# Altium PCB MCU089B.PcbDoc (part 1 of 5)
Units mil, origin at the board's own origin, x right, y up, seen from the top; angles counter-clockwise.
Board outline 2300 x 5500 mil, 4 copper layers (Top Signal, GND, PWR, Bottom Signal), stack 61.6 mil thick; 261 components, 208 nets, 964 pads, 377 vias.
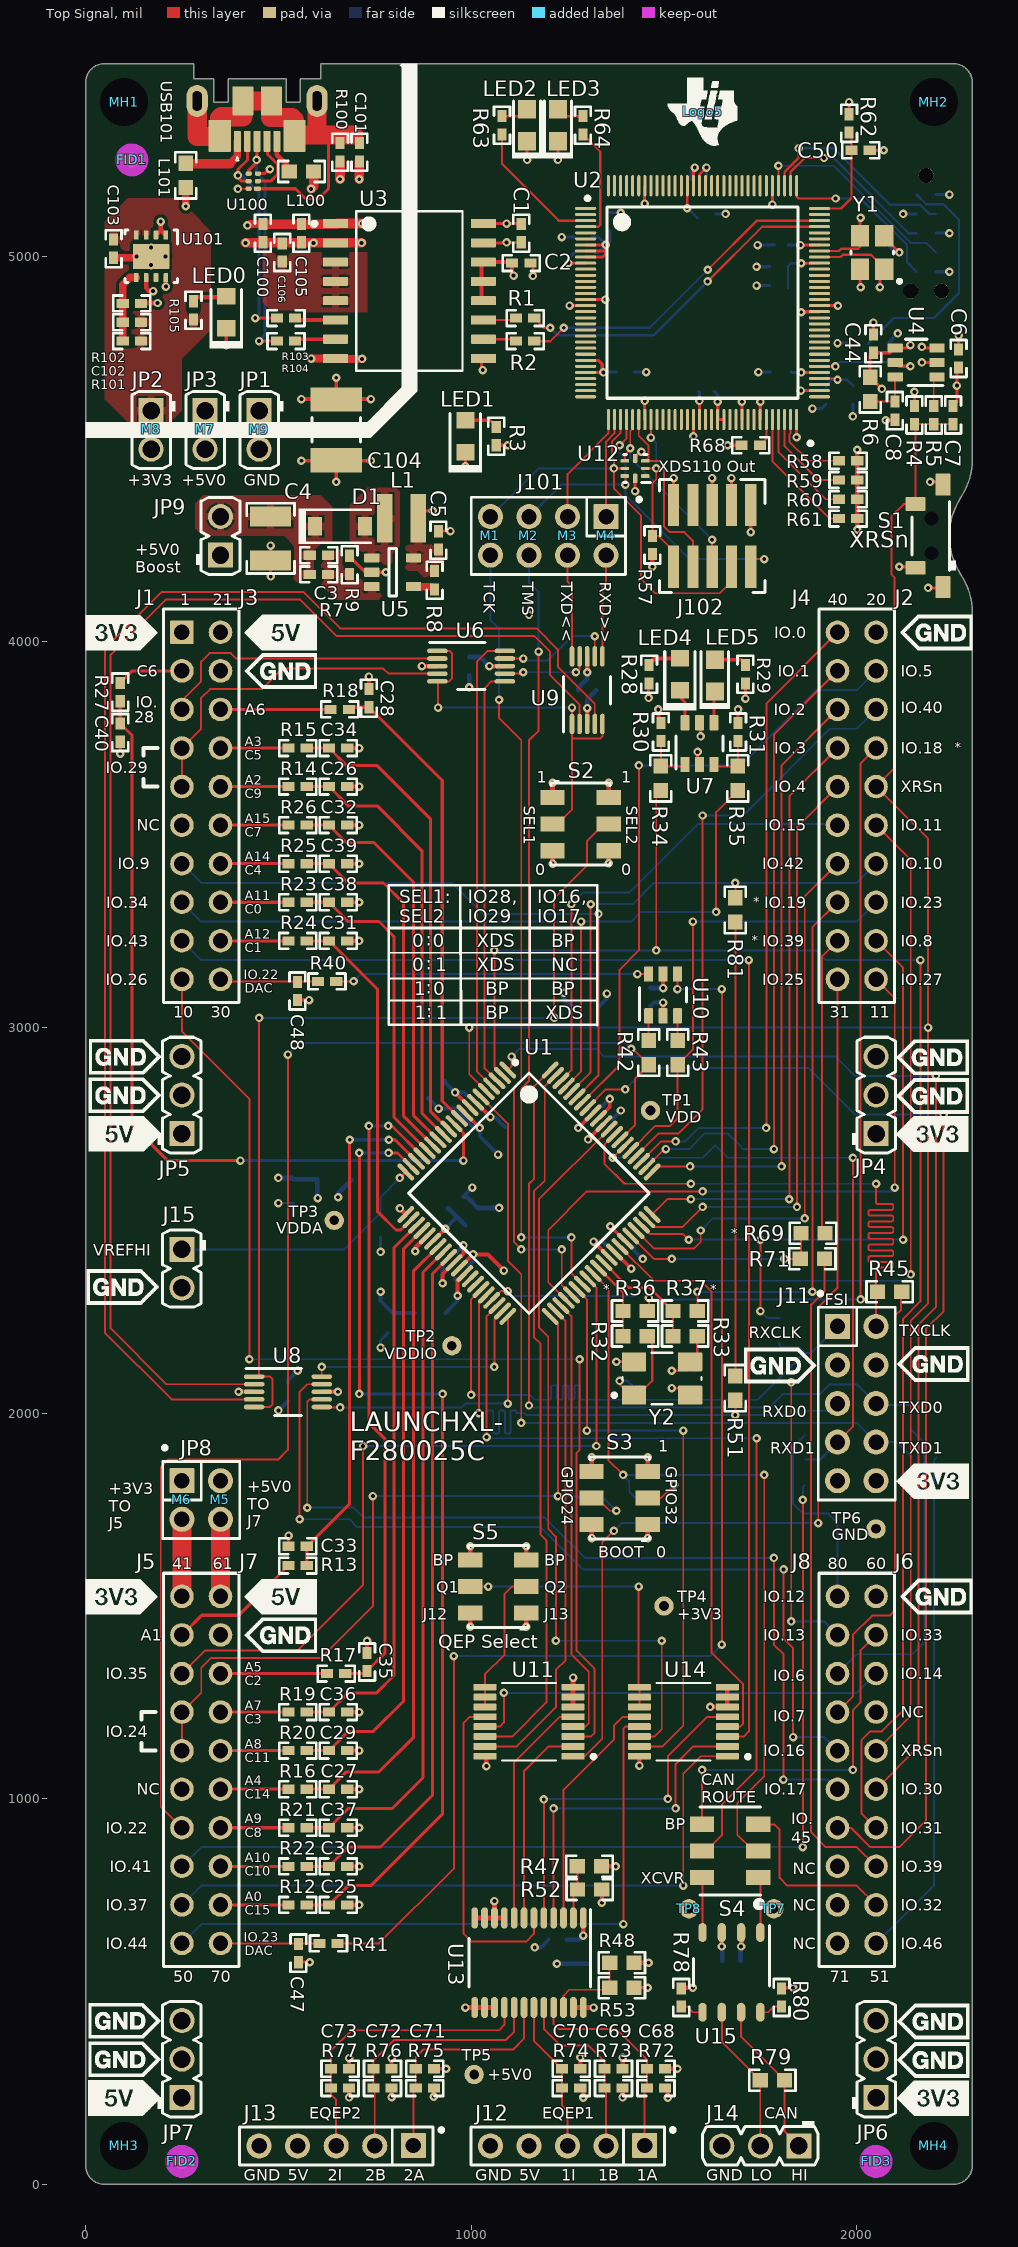
[diagram p0: Top Signal view]
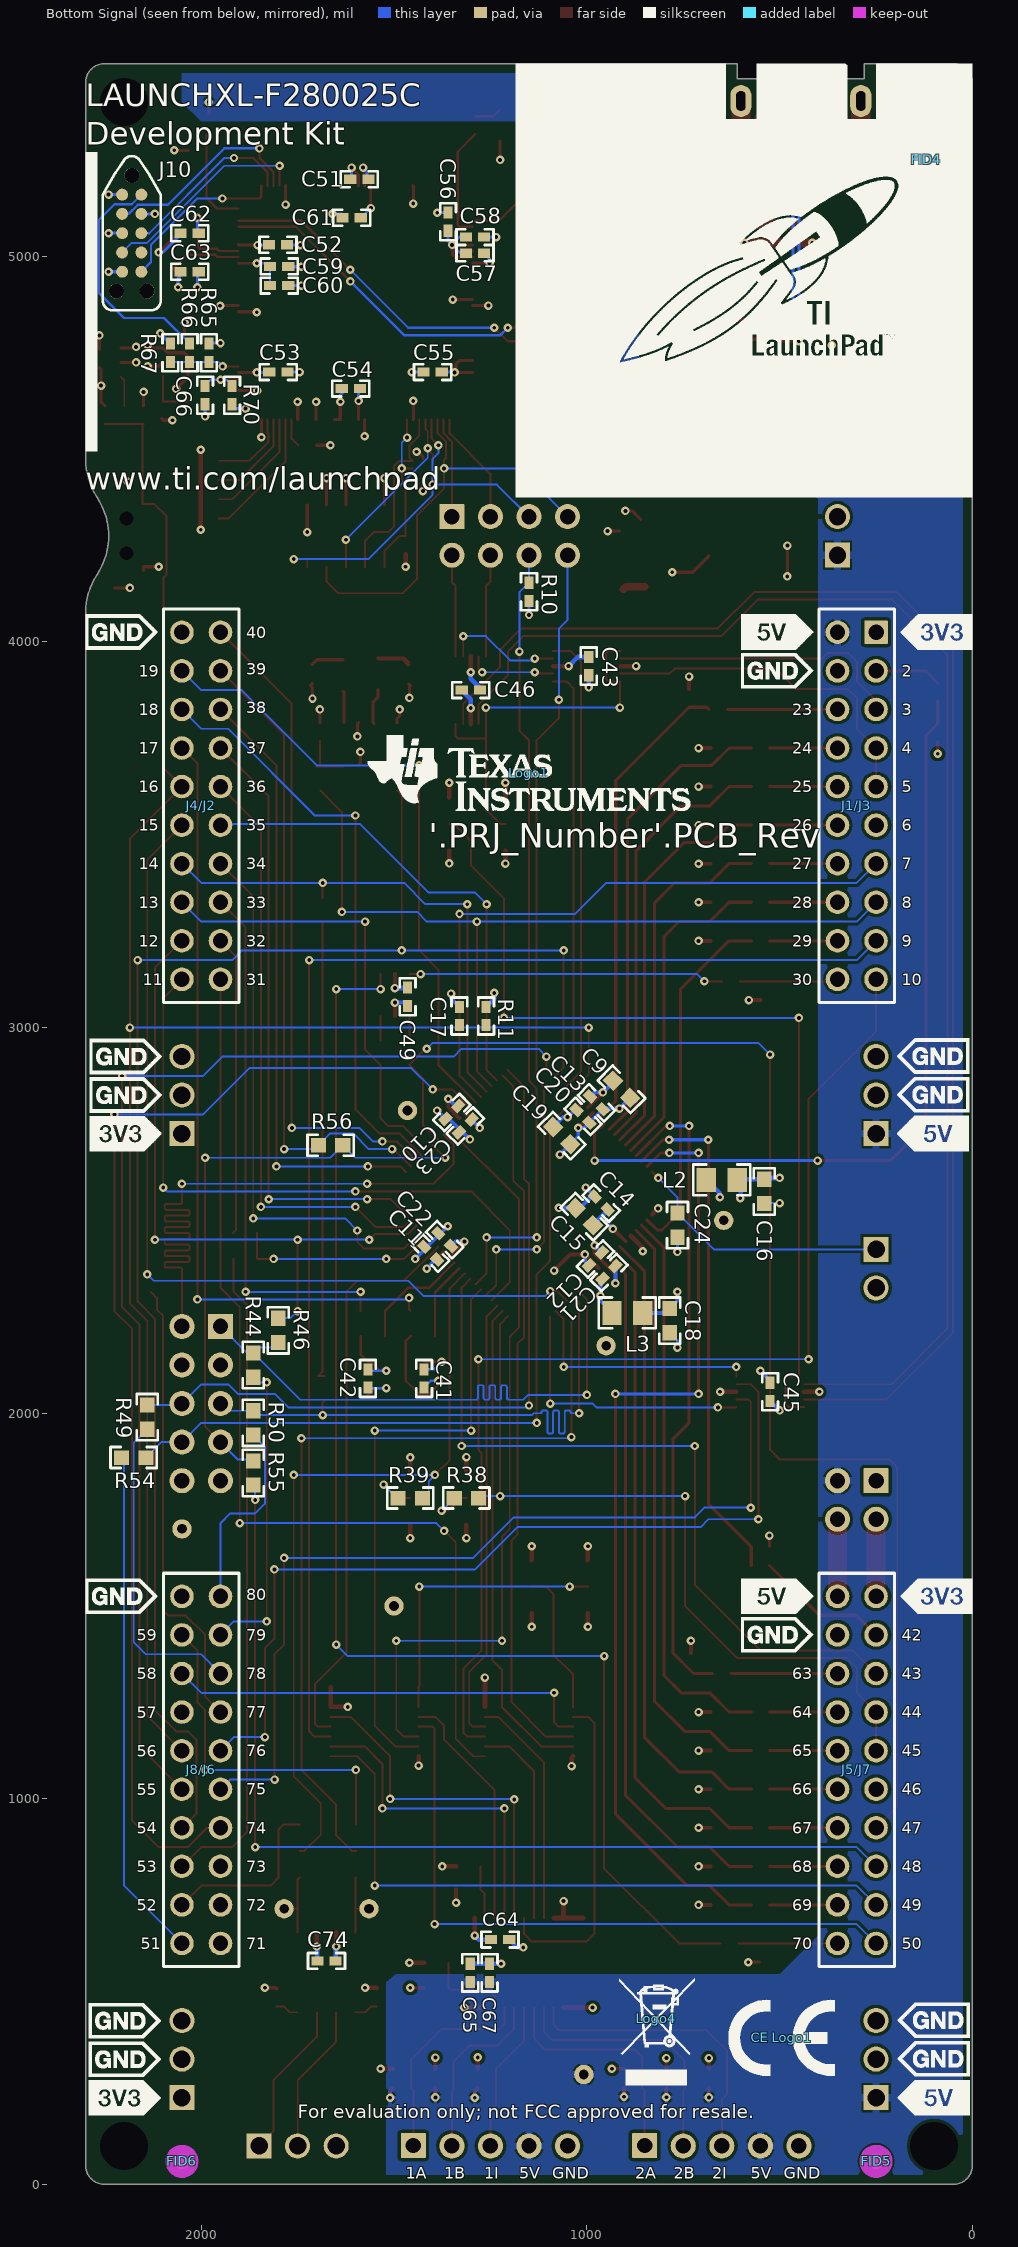
[diagram p1: Bottom Signal view, seen from below]
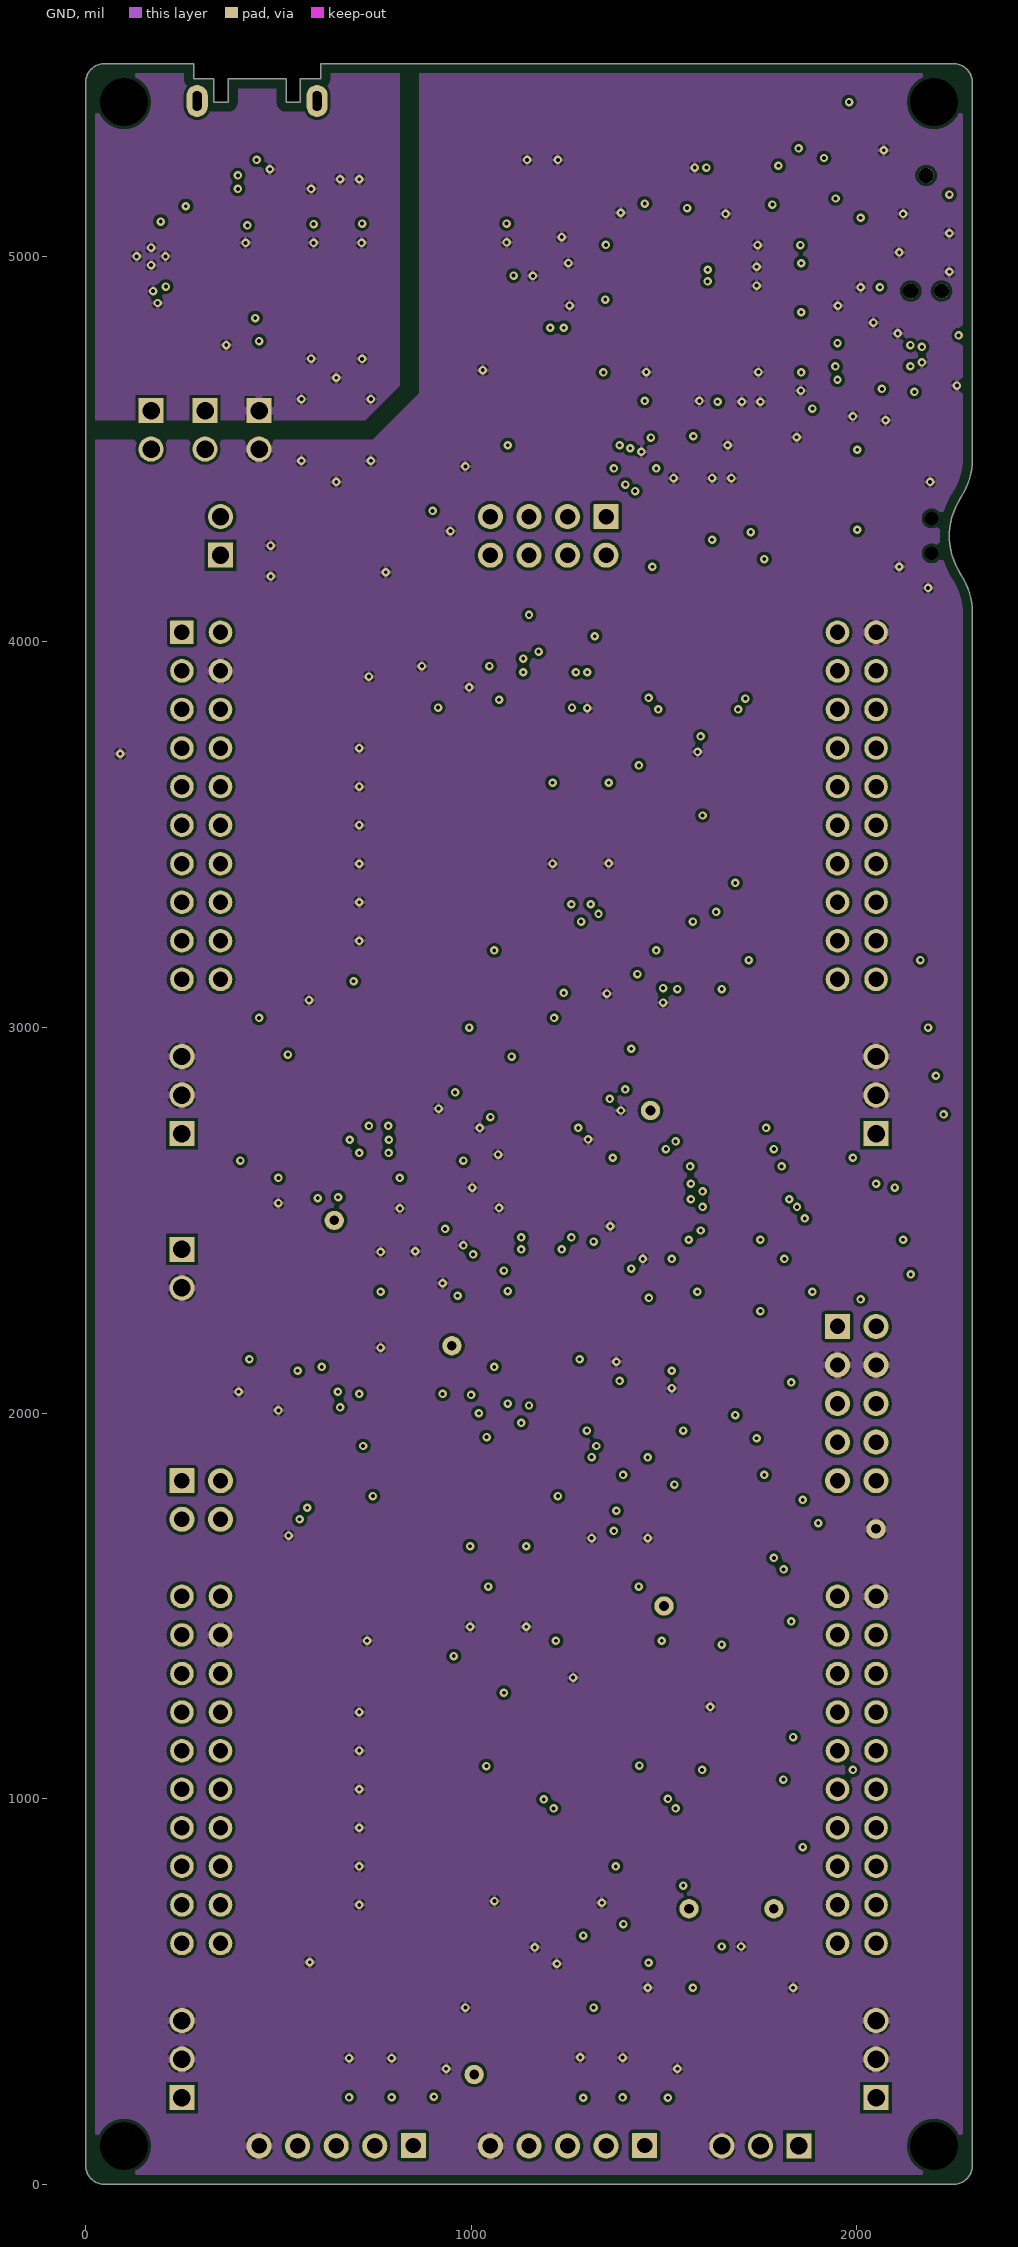
[diagram p2: GND]
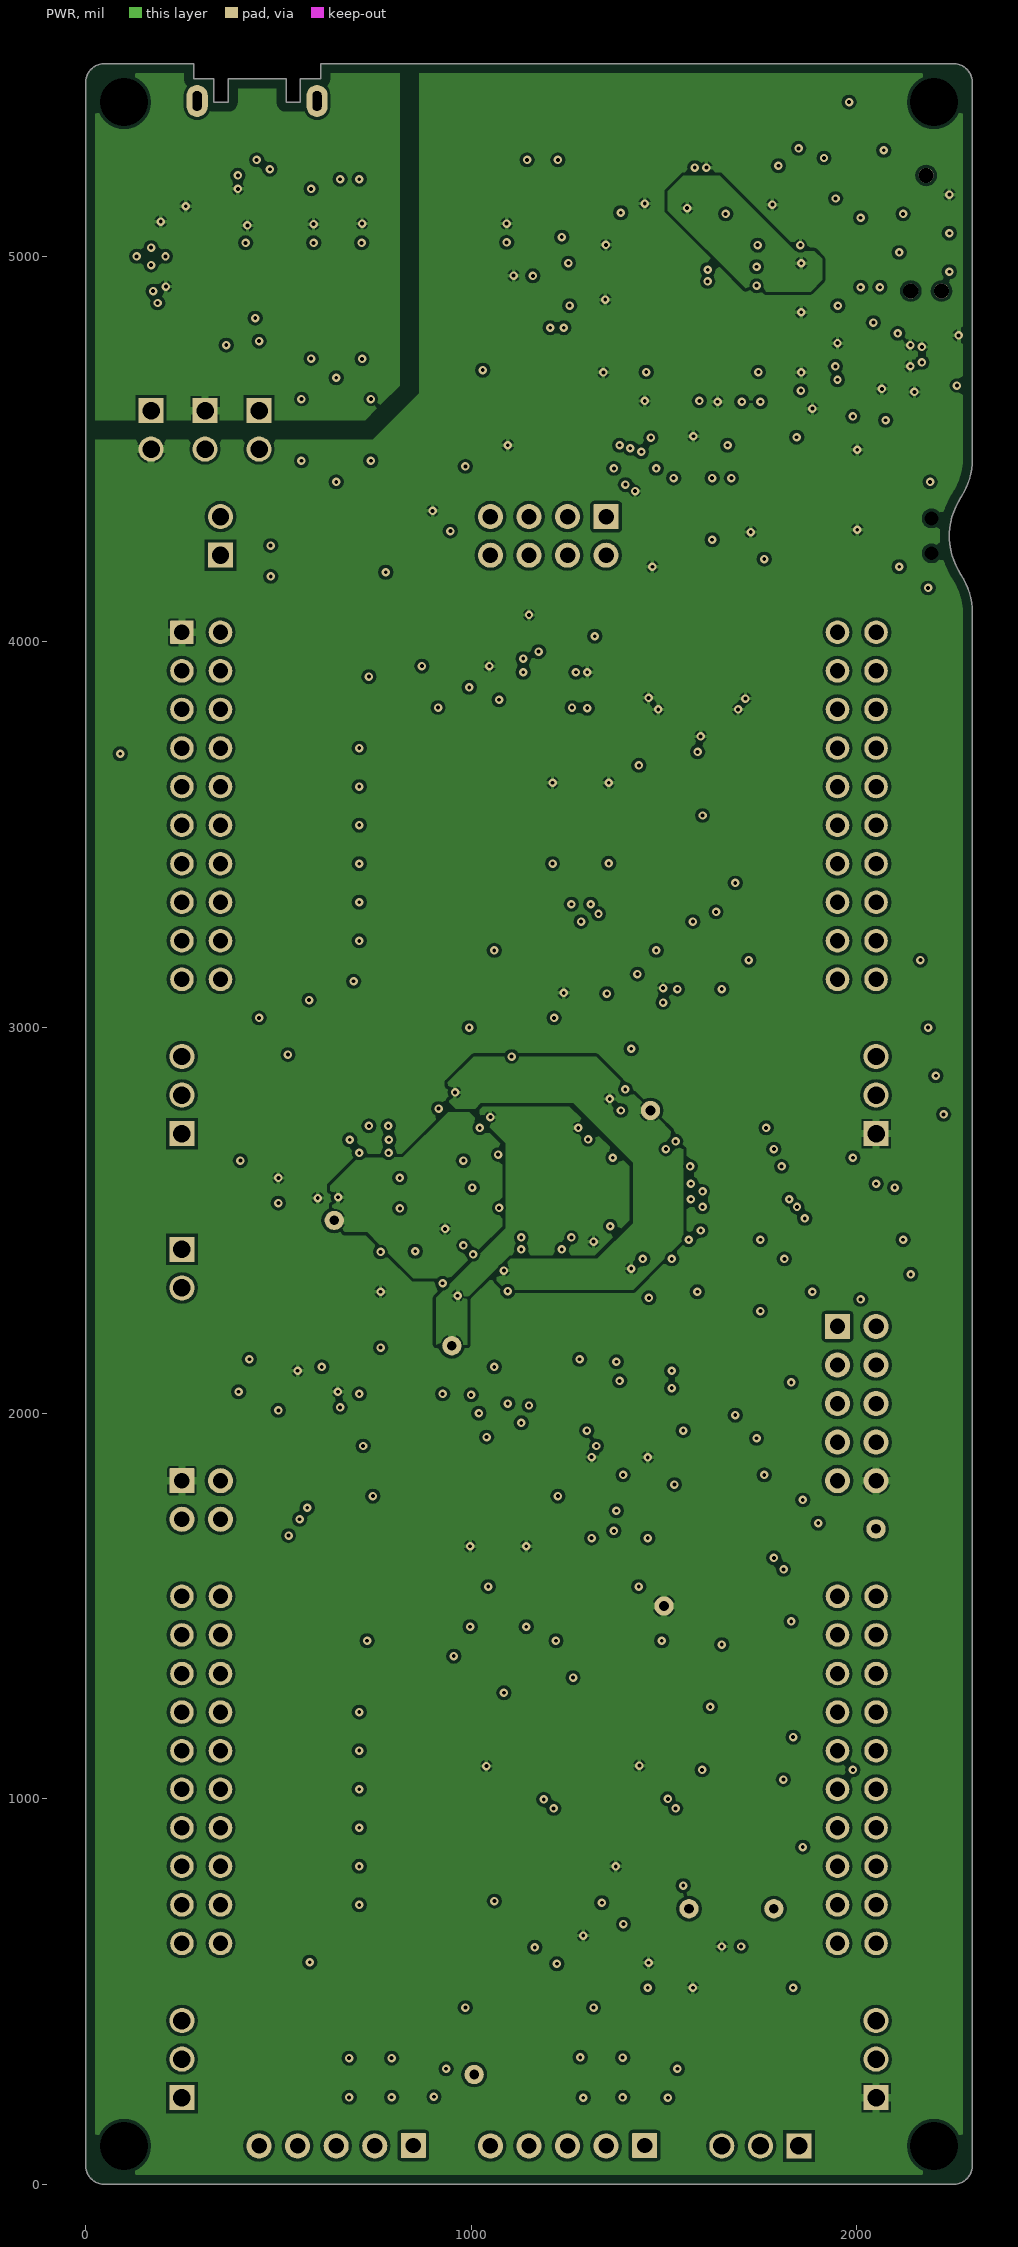
[diagram p3: PWR]

## Layer stack, top to bottom
Top Solder: solder mask 0.4, Solder Resist, Dk 3.5
Top Signal: signal copper 1.4
Dielectric 1: prepreg 8, FR-4, Dk 4.2
GND: signal copper 1.4
Dielectric 2: core 40, FR-4, Dk 4.2
PWR: signal copper 1.4
Dielectric 3: prepreg 8, FR-4, Dk 4.2
Bottom Signal: signal copper 1.4
Bottom Solder: solder mask 0.4, Solder Resist, Dk 3.5

## Board outline
50,0 cw(c50,50) 0,50 0,5450 cw(c50,5450) 50,5500 280,5500 280,5460 333,5460 333,5400 370,5400 370,5460 520,5460 520,5400 557,5400 557,5460 610,5460 610,5500 2250,5500 cw(c2250,5450) 2300,5450 2300,4475 cw(c2118.33,4475) 2270,4375 ccw(c2421.67,4275) 2270,4175 cw(c2118.33,4075) 2300,4075 2300,50 cw(c2250,50) 2250,0

## Design rules (kind name [scope] priority, off if disabled: settings)
AcuteAngle [All] p1: minimum=4.50000000000000E+0001 checktracksonly=TRUE
AssemblyTestPointUsage [All] p1: valid=2
BoardOutlineClearance BoardOutlineClearance_MountingHoles [OnCopper and InComponentClass('Mounting Holes')] p1: gap=40 ignorepadtopadclearanceinfootprint=FALSE
BoardOutlineClearance BoardOutlineClearance_Poly [OnCopper and IsPoly] p2: gap=25 ignorepadtopadclearanceinfootprint=FALSE
BoardOutlineClearance [OnCopper and Not InComponentClass('Logo') and not InComponentClass('FiducialMark') and not InRegion(1000,500,4000,800) and not InPoly] p3: gap=10 ignorepadtopadclearanceinfootprint=FALSE
Clearance Clearance_Boardedge [OnCopper and Not InComponentClass('Logo') and not InComponentClass('FiducialMark') and not IsKeepOut vs IsKeepOut] p1: gap=5 ignorepadtopadclearanceinfootprint=FALSE
Clearance Clearance_FiducialMark [InComponentClass('FiducialMark') vs InComponentClass('FiducialMark')] p2: gap=0 ignorepadtopadclearanceinfootprint=TRUE
Clearance Clearance_Keepouts [((IsTrack Or IsArc) And Not InPoly) And IsFree and IsKeepOut vs ((IsTrack Or IsArc) And Not InPoly) And IsFree and IsKeepOut] p3: gap=5 ignorepadtopadclearanceinfootprint=FALSE
Clearance Clearance_Poly [InPolygon] p4: gap=8 ignorepadtopadclearanceinfootprint=FALSE
Clearance [All] p5: gap=5 ignorepadtopadclearanceinfootprint=FALSE
ComponentClearance "ComponentClearance_overlay to overlay" [OnBottomSilkscreen vs OnTopSilkscreen] p1: gap=0 collisioncheckmode=3 verticalgap=0 showdistances=FALSE
ComponentClearance ComponentClearance_MountingHoles_FiducialMarks [InComponentClass('Mounting Holes') vs InComponentClass('FiducialMark')] p2: gap=50 collisioncheckmode=3 verticalgap=10 showdistances=FALSE
ComponentClearance ComponentClearance_Shunt [InComponentClass('Header') vs InComponentClass('Shunt')] p3: gap=0 collisioncheckmode=3 verticalgap=0 showdistances=FALSE
ComponentClearance ComponentClearance_Logo [InComponentClass('Logo')] p4: gap=0 collisioncheckmode=3 verticalgap=0 showdistances=FALSE
ComponentClearance ComponentClearance_Logo_1 [InComponentClass('Logo') vs InComponentClass('Logo')] p5: gap=0 collisioncheckmode=3 verticalgap=0 showdistances=FALSE
ComponentClearance ComponentClearance_ScrewToNut [(HasFootprint('NY PMS 440 0025 PH')) vs (HasFootprint('Keystone_1902C'))] p6: gap=5 collisioncheckmode=3 verticalgap=10 showdistances=FALSE
ComponentClearance ComponentClearance_MountingHoles [InComponentClass('Mounting Holes')] p7: gap=250 collisioncheckmode=3 verticalgap=100000 showdistances=FALSE
ComponentClearance ComponentClearance_SmallPassives [HasFootprint('0201*') or HasFootprint('0402*') or HasFootprint('0508') or HasFootprint('0603*') or HasFootprint('0612') or HasFootprint('0805*') or HasFootprint('0815*') or HasFootprint('0830*') or HasFootprint('1206*') or HasFootprint('1210*') or HasFootprint('1808*') or HasFootprint('1812*') or HasFootprint('1825*') or HasFootprint('2010*') or HasFootprint('2220*') or HasFootprint('2225*') or HasFootprint('2512*') or HasFootprint('2728*') or HasFootprint('3518*') vs HasFootprint('0201*') or HasFootprint('0402*') or HasFootprint('0508') or HasFootprint('0603*') or HasFootprint('0612') or HasFootprint('0805*') or HasFootprint('0815*') or HasFootprint('0830*') or HasFootprint('1206*') or HasFootprint('1210*') or HasFootprint('1808*') or HasFootprint('1812*') or HasFootprint('1825*') or HasFootprint('2010*') or HasFootprint('2220*') or HasFootprint('2225*') or HasFootprint('2512*') or HasFootprint('2728*') or HasFootprint('3518*')] p8: gap=10 collisioncheckmode=3 verticalgap=0 showdistances=FALSE
ComponentClearance ComponentClearance_THtoSMT [IsThruComponent vs IsSMTComponent] p9: gap=10 collisioncheckmode=3 verticalgap=10 showdistances=FALSE
ComponentClearance ComponentClearance_THtoTH [IsThruComponent vs IsThruComponent] p10: gap=20 collisioncheckmode=3 verticalgap=30 showdistances=FALSE
DiffPairsRouting [All] p1: maxlimit=100 minlimit=10 mostfreqgap=10 toplayer_minwidth=15 toplayer_maxwidth=15 toplayer_prefwidth=15 midlayer1_minwidth=15 midlayer1_maxwidth=15 midlayer1_prefwidth=15 midlayer2_minwidth=15 midlayer2_maxwidth=15 midlayer2_prefwidth=15 bottomlayer_minwidth=15 bottomlayer_maxwidth=15 bottomlayer_prefwidth=15 maxuncoupledlength=1000
FabricationTestPointUsage TestPointUsage [All] p1: valid=2 allowmultiple=FALSE
FabricationTestpoint Testpoint [All] p1: side=3 testpointundercomponent=TRUE minsize=40 maxsize=100 preferedsize=60 minholesize=0 maxholesize=40 preferedholesize=32 testpointgrid=1 allowsidetop=TRUE allowsidebottom=TRUE usegrid=TRUE gridtolerance=0.01
FanoutControl Fanout_LCC [IsLCC] p1: bgadir=Out bgaviamode=Centered fanoutstyle=Auto fanoutdirection=Alternating viagrid=1 // Fanout_LCC (Default Rule)
FanoutControl Fanout_BGA [IsBGA] p2: bgadir=Out bgaviamode=Centered fanoutstyle=Auto fanoutdirection=Alternating viagrid=1 // Fanout_BGA (Default Rule)
FanoutControl Fanout_Default [All] p4: bgadir=Out bgaviamode=Centered fanoutstyle=Auto fanoutdirection=Alternating viagrid=1 // Fanout_Default (Default Rule)
FanoutControl Fanout_Small [(CompPinCount < 5)] p5: bgadir=Out bgaviamode=Centered fanoutstyle=Auto fanoutdirection=OutThenIn viagrid=1 // Fanout_Small (Default Rule)
HoleSize [All] p1: absolutevalues=TRUE maxlimit=251 minlimit=10 maxpercent=80.000 minpercent=20.000
MatchedLengths FSIRX [InNetClass('FSIRX')] p1: tolerance=25 checknetsindiffpair=FALSE checkdiffpairvsdiffpair=TRUE checkxsignals=TRUE checkothers=TRUE
MatchedLengths FSITX [InNetClass('FSITX')] p2: tolerance=25 checknetsindiffpair=FALSE checkdiffpairvsdiffpair=TRUE checkxsignals=TRUE checkothers=TRUE
MinimumAnnularRing MinimumAnnularRing_ThermalPadVias [IsVia and InAnyComponent] p1: minimumring=5
MinimumAnnularRing [All] p2: minimumring=6
MinimumSolderMaskSliver MinimumSolderMaskSliver_Logo [InComponentClass('Logo') vs InComponentClass('Logo')] p1: minsoldermaskwidth=0.7
MinimumSolderMaskSliver [All] p2: minsoldermaskwidth=3
PlaneClearance [All] p1: clearance=5
PlaneConnect [All] p1: planeconnectstyle=Relief reliefexpansion=10 reliefentries=4 reliefconductorwidth=25 reliefairgap=10
PolygonConnect PolygonConnect_via [ViaDiameter = 22] p1: connectstyle=Relief reliefconductorwidth=10 reliefentries=4 polygonreliefangle="90 Angle" airgapwidth=5
PolygonConnect [All] p2: connectstyle=Relief reliefconductorwidth=20 reliefentries=4 polygonreliefangle="90 Angle" airgapwidth=5
RoutingVias ThermalPadVias [IsVia and InAnyComponent] p1: holewidth=7.87 width=19.68 viastyle="Through Hole" minholewidth=7.87 minwidth=19.68 maxholewidth=12.99 maxwidth=23.62
RoutingVias [All] p2: holewidth=10 width=22 viastyle="Through Hole" minholewidth=10 minwidth=22 maxholewidth=40 maxwidth=65
SilkToBoardRegionClearance [Not ((IsComment or IsDesignator) And (Hide <> 'False')) and not InRegion(1000,500,4000,800)] p1:
SilkToSilkClearance SilkToSilkClearance_Pb-FreeLogo [(HasFootprint('Pb-Free_Overlay_Medium') OR HasFootprint('Pb-Free_Overlay_Small')) vs (HasFootprint('Pb-Free_Overlay_Medium') OR HasFootprint('Pb-Free_Overlay_Small'))] p1: silktosilkclearance=0
SilkToSilkClearance [All] p2: silktosilkclearance=3
SilkToSolderMaskClearance SilkToComponentPadClearance [(IsPad or IsFill or IsRegion) and InAnycomponent] p1: minsilkscreentomaskgap=3 clearancetoexposedcopper=TRUE
SilkToSolderMaskClearance "Silk to Solder Mask Opening" [All] p2: minsilkscreentomaskgap=3 clearancetoexposedcopper=TRUE
SolderMaskExpansion [All] p1: expansion=2 istentingtop=FALSE
Width Analog [InNetClass('Analog')] p1: maxlimit=25 minlimit=8 preferedwidth=8
Width [All] p2: maxlimit=100 minlimit=5 preferedwidth=5 checkconnectedcopper=TRUE
14 further rules are at their usual default settings.

## Classes and differential pairs
component class MCU089B_XDS110_USB_Power: C1 C2 C3 C4 C5 C6 C7 C8 C100 C101 C102 C103 C104 C105 C106 D1 JP1 JP2 JP3 JP4 JP5 JP6 JP7 JP9 JP10 L1 L100 L101 LED0 LED1 R1 R2 R3 R4 R5 R6 R7 R8 R9 R100 R101 R102 R103 R104 R105 TP1 TP2 TP3 TP4 TP5 TP6 U3 U4 U5 U100 U101 USB101
component class MCU089B_XDS110_MCU: C50 C51 C52 C53 C54 C55 C56 C57 C58 C59 C60 C61 C62 C63 C66 J10 J101 J102 LED2 LED3 R57 R58 R59 R60 R61 R62 R63 R64 R65 R66 R67 R68 R70 R? U2 U12 Y1
component class MCU089B_F280025C_Device: C9 C10 C11 C12 C13 C14 C15 C16 C17 C18 C19 C20 C21 C22 C23 C24 C25 C26 C27 C28 C29 C30 C31 C32 C33 C34 C35 C36 C37 C38 C39 C40 J15 L2 L3 R10 R11 R12 R13 R14 R15 R16 R17 R18 R19 R20 R21 R22 R23 R24 R25 R26 R27 S1 U1
component class MCU089B_Connectors: C68 C69 C70 C71 C72 C73 C74 J1/J3 J4/J2 J5/J7 J8/J6 J11 J12 J13 J14 JP8 R69 R71 R72 R73 R74 R75 R76 R77 R78 R79 R80 TP7 TP8 U15
component class MCU089B_AltRouting_Misc: C41 C42 C43 C44 C45 C46 C47 C48 C49 C64 C65 C67 LED4 LED5 R28 R29 R30 R31 R32 R33 R34 R35 R36 R37 R38 R39 R40 R41 R42 R43 R44 R45 R46 R47 R48 R49 R50 R51 R52 R53 R54 R55 R56 R81 S2 S3 S4 S5 U6 U7 U8 U9 U10 U11 U13 U14 Y2
component class Header: J11 J12 J13 J14 J15 J101 JP1 JP2 JP3 JP4 JP5 JP6 JP7 JP8 JP9 JP10
component class AssemblyNote: ZZ1 ZZ2 ZZ3
component class FiducialMark: FID1 FID2 FID3 FID4 FID5 FID6
component class MCU089B_Hardware: "CE Logo1" FID1 FID2 FID3 FID4 FID5 FID6 Logo1 Logo3 Logo4 Logo5 M1 M2 M3 M4 M5 M6 M7 M8 M9 MH1 MH2 MH3 MH4 ZZ1 ZZ2 ZZ3
component class Logo: Logo1 Logo5
net class FSIRX: GPIO12_FSIRXD0 GPIO13_FSIRXCLK GPIO41_FSIRXD1
net class FSITX: GPIO6_FSITXD0 GPIO7_FSITXCLK GPIO46_FSITXD1
component class Shunt: M1 M2 M3 M4 M5 M6 M7 M8 M9

## Components (designator, comment, footprint, x,y, rotation, side; value= is the part's Value field where it differs from the comment)
C1 "GRM155R71A104KA01D" 0402 1130,5060 r90 top value=0.1uF
C2 "GRM155R71A104KA01D" 0402 1130,4982.36 r180 top value=0.1uF
C3 "GRM1555C1E821JA01D" 0402 605,4225 r0 top value=820pF
C4 "885012209028" 1210_220 480,4268.53 r270 top value=10uF
C5 "885012105008" 0402 915,4263.62 r90 top value=4.7uF
C6 "GRM155R71A104KA01D" 0402 2264.02,4735 r90 top value=0.1uF
C7 "GRM155R71E103KA01D" 0402 2249.61,4588.38 r90 top value=0.01uF
C8 "GRM155R71E103KA01D" 0402 2099.02,4600 r270 top value=0.01uF
C9 "GRM188R61A106ME69D" 0603 910,2840 r45 bottom value=10uF
C10 "GRM155R71A104KA01D" 0402 1350,2780 r315 bottom value=0.1uF
C11 "GRM155R71A104KA01D" 0402 1405,2415 r45 bottom value=0.1uF
C12 "GRM155R71A104KA01D" 0402 977.67,2400 r135 bottom value=0.1uF
C13 "GRM155R71A104KA01D" 0402 975,2805 r225 bottom value=0.1uF
C14 "GRM155R71A104KA01D" 0402 962.67,2545 r225 bottom value=0.1uF
C15 "GRM188R61A225KE34D" 0603 1006.58,2510 r45 bottom value=2.2uF
C16 "GRM188R61A225KE34D" 0603 540,2575 r270 bottom value=2.2uF
C17 "GRM155R71A104KA01D" 0402 1330.24,3030 r270 bottom value=0.1uF
C18 "GRM188R61A106ME69D" 0603 785,2240 r270 bottom value=10uF
C19 "GRM188R61A106ME69D" 0603 1065,2720 r225 bottom value=10uF
C20 "GRM155R71A104KA01D" 0402 1010,2770 r45 bottom value=0.1uF
C21 "GRM155R71A104KA01D" 0402 942.67,2365 r315 bottom value=0.1uF
C22 "GRM155R71A104KA01D" 0402 1368.55,2450 r225 bottom value=0.1uF
C23 "GRM155R71A104KA01D" 0402 1315,2745 r135 bottom value=0.1uF
C24 "GRM188R61A225KE34D" 0603 765,2487.73 r270 bottom value=2.2uF
C25 "C1005C0G1H221F050BA" 0402 655,725 r0 top value=220pF
C26 "C1005C0G1H221F050BA" 0402 655,3625 r0 top value=220pF
C27 "C1005C0G1H221F050BA" 0402 655,1025 r0 top value=220pF
C28 "C1005C0G1H221F050BA" 0402 735,3854.31 r90 top value=220pF
C29 "C1005C0G1H221F050BA" 0402 655,1125 r0 top value=220pF
C30 "C1005C0G1H221F050BA" 0402 655,825 r0 top value=220pF
C31 "C1005C0G1H221F050BA" 0402 655,3225 r0 top value=220pF
C32 "C1005C0G1H221F050BA" 0402 655,3525 r0 top value=220pF
C33 "C1005C0G1H221F050BA" 0402 550,1655 r180 top value=220pF
C34 "C1005C0G1H221F050BA" 0402 655,3725 r0 top value=220pF
C35 "C1005C0G1H221F050BA" 0402 730,1355 r90 top value=220pF
C36 "C1005C0G1H221F050BA" 0402 655,1225 r0 top value=220pF
C37 "C1005C0G1H221F050BA" 0402 655,925 r0 top value=220pF
C38 "C1005C0G1H221F050BA" 0402 655,3325 r0 top value=220pF
C39 "C1005C0G1H221F050BA" 0402 655,3425 r0 top value=220pF
C40 "C1005C0G1H221F050BA" 0402 90,3765 r270 top value=220pF
C41 "C0402C120J3GACAUTO" 0402 1422.17,2090 r90 bottom value=12pF
C42 "C0402C120J3GACAUTO" 0402 1567.83,2090 r270 bottom value=12pF
C43 "GRM155R71A104KA01D" 0402 995,3937.39 r270 bottom value=0.1uF
C44 "GRM155R71A104KA01D" 0402 2043.23,4773.62 r270 top value=0.1uF
C45 "GRM155R71A104KA01D" 0402 525,2055.5 r270 bottom value=0.1uF
C46 "GRM155R71A104KA01D" 0402 1300.9,3875 r180 bottom value=0.1uF
C47 "TMK105B7104MV-FR" 0402 551.91,600 r270 top value=0.1uF
C48 "TMK105B7104MV-FR" 0402 549.19,3095 r270 top value=0.1uF
C49 "GRM155R71A104KA01D" 0402 1465,3080 r90 bottom value=0.1uF
C50 "GRM155R71E103KA01D" 0402 2010,5275 r0 top value=0.01uF
C51 "GRM155R71E103KA01D" 0402 1590,5200 r180 bottom value=0.01uF
C52 "GRM155R71E103KA01D" 0402 1801,5030 r180 bottom value=0.01uF
C53 "GRM155R71E103KA01D" 0402 1800,4700 r180 bottom value=0.01uF
C54 "GRM155R70J104KA01D" 0402 1612,4657 r180 bottom value=0.1uF
C55 "GRM155R70J104KA01D" 0402 1400,4700 r0 bottom value=0.1uF
C56 "885012105012" 0402 1360,5090 r90 bottom value=1uF
C57 "885012105012" 0402 1290,5008 r180 bottom value=1uF
C58 "GRM155R71E103KA01D" 0402 1290,5050 r180 bottom value=0.01uF
C59 "GRM155R60J225KE95D" 0402 1798,4974 r180 bottom value=2.2uF
C60 "GRM155R70J104KA01D" 0402 1798,4924 r180 bottom value=0.1uF
C61 "885012105012" 0402 1610,5100 r0 bottom value=1uF
C62 "C0402C120J3GACAUTO" 0402 2030,5060 r0 bottom value=12pF
C63 "C0402C120J3GACAUTO" 0402 2030,4960 r180 bottom value=12pF
C64 "GRM155R71A104KA01D" 0402 1225,635.05 r180 bottom value=0.1uF
C65 "GRM155R71A104KA01D" 0402 1302.4,548.62 r270 bottom value=0.1uF
C66 "GRM155R70J104KA01D" 0402 1990,4640 r270 bottom value=0.1uF
C67 "885012205061" 0402 1252.36,548.62 r90 bottom value=1000pF
C68 "885012205061" 0402 1479.25,300 r0 top value=1000pF
C69 "885012205061" 0402 1369.25,300 r0 top value=1000pF
C70 "885012205061" 0402 1259.25,300 r0 top value=1000pF
C71 "885012205061" 0402 880,300 r0 top value=1000pF
C72 "885012205061" 0402 770,300 r0 top value=1000pF
C73 "885012205061" 0402 660,300 r0 top value=1000pF
C74 "GRM155R71A104KA01D" 0402 1675,580 r180 bottom value=0.1uF
C100 "GRM155R60J225KE95D" 0402 460,5060 r270 top value=2.2uF
C101 "GRM155R71H332KA01D" 0402 710,5270 r270 top value=3300pF
C102 "885012005056" 0402 120,4829 r180 top value=15pF
C103 "GRM155R60J225KE95D" 0402 73,5020 r270 top value=2.2uF
C104 "1812SC103KAT1A" 1812 650,4550 r90 top value=0.01uF
C105 "GRM155R71A104KA01D" 0402 560,5060 r90 top value=0.1uF
C106 "GRM155R71A104KA01D" 0402 510,5010 r270 top value=0.1uF
"CE Logo1" "CE Mark" CE_Mark_5mm 495,380 r180 bottom
D1 "1N5819HW-7-F" SOD-123 660,4300 r0 top value=40V
FID1 "Fiducial" Fiducial10-20 120,5250 r0 top
FID2 "Fiducial" Fiducial10-20 250,60 r0 top
FID3 "Fiducial" Fiducial10-20 2050,60 r0 top
FID4 "Fiducial" Fiducial10-20 120,5250 r180 bottom
FID5 "Fiducial" Fiducial10-20 250,60 r180 bottom
FID6 "Fiducial" Fiducial10-20 2050,60 r180 bottom
J1/J3 "SSQ-110-03-T-D" BoosterPack_40pin_J1J3 300,3575 r180 bottom locked
J4/J2 "SSQ-110-03-T-D" BoosterPack_40pin_J2J4 2000,3575 r180 bottom locked
J5/J7 "SSQ-110-03-T-D" BoosterPack_40pin_J5J7 300,1075 r180 bottom locked
J8/J6 "SSQ-110-03-T-D" BoosterPack_40pin_J6J8 2000,1075 r180 bottom locked
J10 "TC2050-IDC-NL-FP" Tag_TC2050-NL 2180,5060 r180 bottom locked
J11 "TSW-105-07-G-D" TSW-105-07-G-D 2000,2025 r270 top locked
J12 "TSW-105-07-G-S" TSW-105-07-X-S 1250,100 r180 top locked
J13 "TSW-105-07-G-S" TSW-105-07-X-S 650,100 r180 top locked
J14 "61300311121" WURTH_61300311121 1750,100 r180 top locked
J15 "61300211121" WURTH_61300211121 250,2375 r270 top locked
J101 "TSW-104-07-G-D" TSW-104-07-G-D 1200,4275 r180 top
J102 "FTSH-105-01-F-DV-K" Samtec_FTSH-105-01-x-DV-K 1625,4275 r270 top
JP1 "61300211121" WURTH_61300211121 450,4550 r270 top
JP2 "61300211121" WURTH_61300211121 170,4550 r270 top
JP3 "61300211121" WURTH_61300211121 310,4550 r270 top
JP4 "61300311121" WURTH_61300311121 2050,2825 r90 top
JP5 "61300311121" WURTH_61300311121 250,2825 r90 top locked
JP6 "61300311121" WURTH_61300311121 2050,325 r90 top locked
JP7 "61300311121" WURTH_61300311121 250,325 r90 top locked
JP8 "TSW-102-07-G-D" TSW-102-07-G-D 300,1775 r270 top locked
JP9 "61300211121" WURTH_61300211121 350,4275 r90 top
L1 "744025003" WE-TPC_2828 819.47,4320.38 r180 top value=3.3uH
L2 "742792063" 0805_HV 650,2605 r180 bottom value="60 ohm"
L3 "742792022" 0805_HV 895,2260 r0 bottom value="220 ohm"
L100 "742792620" 0603 560,5220 r0 top value="100 ohm"
L101 "742792620" 0603 260,5210 r270 top value="100 ohm"
LED0 "150080SS75000" WL-SMCW_RED_0805 365,4855 r90 top value=Red
LED1 "150080SS75000" WL-SMCW_RED_0805 985,4533.66 r90 top value=Red
LED2 "LTST-C170TBKT" LTST-C170TBKT_Blue 1145,5340 r270 top value=Blue
LED3 "LTST-C170TBKT" LTST-C170TBKT_Blue 1225,5340 r270 top value=Blue
LED4 "150080SS75000" WL-SMCW_RED_0805 1541.41,3916.37 r90 top value=Red
LED5 "LTST-C171GKT" LED_LTST-C171 1632.04,3912.53 r270 top value=Green
Logo1 "Texas Instruments" TI_Stacked_Overlay_Small 1150,3660 r180 bottom
Logo3 "FCC disclaimer" FCC_disclaimer 3295,160 r180 bottom
Logo4 "WEEE logo" WEEE_Minimum 820,430 r180 bottom
Logo5 "Texas Instruments" TI_Symbol_Overlay_Small 1600,5375 r0 top
M1 "60900213421" Wurth_60900213421 1050,4275 r270 top
M2 "60900213421" Wurth_60900213421 1150,4275 r90 top
M3 "60900213421" Wurth_60900213421 1250,4275 r90 top
M4 "60900213421" Wurth_60900213421 1350,4275 r90 top
M5 "60900213421" Wurth_60900213421 350,1775 r90 top
M6 "60900213421" Wurth_60900213421 250,1775 r90 top
M7 "60900213421" Wurth_60900213421 310,4551 r90 top
M8 "60900213421" Wurth_60900213421 170,4551 r90 top
M9 "60900213421" Wurth_60900213421 450,4550 r90 top
MH1 "MTG_NoPads" NPTH125mil 100,5400 r0 top
MH2 "MTG_NoPads" NPTH125mil 2200,5400 r0 top
MH3 "MTG_NoPads" NPTH125mil 100,100 r0 top
MH4 "MTG_NoPads" NPTH125mil 2200,100 r0 top
R1 "RC0402JR-070RL" 0402 1140,4840 r0 top value=0
R2 "RC0402JR-070RL" 0402 1140,4780 r0 top value=0
R3 "CRCW0402680RJNED" 0402 1065,4533.66 r270 top value=680
R4 "CRCW04022K20JNED" 0402 2149.61,4588.38 r90 top value=2.2k
R5 "CRCW04020000Z0ED" 0402 2199.61,4588.38 r270 top value=0
R6 "CRCW06032K20JNEA" 0603 2034.61,4655.12 r90 top value=2.2k
R7 "RC0402FR-0730K1L" 0402 605,4175 r180 top value=30.1k
R8 "CRCW040210K0JNED" 0402 905,4160 r90 top value=10k
R9 "CRCW040210K0JNED" 0402 685,4200 r270 top value=10k
R10 "CRCW04022K20JNED" 0402 1150,4130 r270 bottom value=2.2k
R11 "CRCW04022K20JNED" 0402 1261.06,3030 r90 bottom value=2.2k
R12 "ERJ-2GE0R00X" 0402 550,725 r0 top value=0
R13 "ERJ-2GE0R00X" 0402 550,1605 r0 top value=0
R14 "ERJ-2GE0R00X" 0402 550,3625 r0 top value=0
R15 "ERJ-2GE0R00X" 0402 550,3725 r0 top value=0
R16 "ERJ-2GE0R00X" 0402 550,1025 r0 top value=0
R17 "ERJ-2GE0R00X" 0402 650,1325 r0 top value=0
R18 "ERJ-2GE0R00X" 0402 659.31,3825 r0 top value=0
R19 "ERJ-2GE0R00X" 0402 550,1225 r0 top value=0
R20 "ERJ-2GE0R00X" 0402 550,1125 r0 top value=0
R21 "ERJ-2GE0R00X" 0402 550,925 r0 top value=0
R22 "ERJ-2GE0R00X" 0402 550,825 r0 top value=0
R23 "ERJ-2GE0R00X" 0402 550,3325 r0 top value=0
R24 "ERJ-2GE0R00X" 0402 550,3225 r0 top value=0
R25 "ERJ-2GE0R00X" 0402 550,3425 r0 top value=0
R26 "ERJ-2GE0R00X" 0402 550,3525 r0 top value=0
R27 "ERJ-2GE0R00X" 0402 90,3870 r270 top value=0
R28 "CRCW0402680RJNED" 0402 1461.41,3916.37 r270 top value=680
R29 "CRCW0402680RJNED" 0402 1711.41,3916.37 r270 top value=680
R30 "CRCW040210M0JNED" 0402 1492.04,3766.53 r90 top value=10Meg
R31 "CRCW040210M0JNED" 0402 1692.04,3766.53 r90 top value=10Meg
R32 "CRCW06030000Z0EA" 0603 1425.36,2200 r0 top value=0
R33 "CRCW06030000Z0EA" 0603 1555,2200 r0 top value=0
R34 "CRCW06030000Z0EA" 0603 1492.04,3646.53 r90 top value=0
R35 "CRCW06030000Z0EA" 0603 1691.04,3646.53 r90 top value=0
R36 "CRCW06030000Z0EA" 0603 1425.36,2265 r180 top value=0
R37 "CRCW06030000Z0EA" 0603 1555,2265 r180 top value=0
R38 "RC0603FR-0710KL" 0603 1312.28,1780 r0 bottom value=10.0k
R39 "RC0603FR-0710KL" 0603 1457.95,1780 r180 bottom value=10.0k
R40 "CRCW04021K00FKED" 0402 626.38,3120 r180 top value=1.00k
R41 "CRCW04021K00FKED" 0402 630,625 r180 top value=1.00k
R42 "CRCW06030000Z0EA" 0603 1460.2,2935 r90 top value=0
R43 "CRCW06030000Z0EA" 0603 1535.63,2935 r90 top value=0
R44 "CRCW06030000Z0EA" 0603 1865,2125 r270 bottom value=0
R45 "CRCW06030000Z0EA" 0603 2085,2314.88 r0 top value=0
R46 "CRCW06030000Z0EA" 0603 1800,2215 r90 bottom value=0
R47 "CRCW06030000Z0EA" 0603 1306.85,825 r0 top value=0
R48 "CRCW06032K20JNEA" 0603 1390.75,575 r0 top value=2.2k
R49 "CRCW06030000Z0EA" 0603 2140,1990 r270 bottom value=0
R50 "CRCW06030000Z0EA" 0603 1865,1975 r270 bottom value=0
R51 "CRCW06030000Z0EA" 0603 1685,2065 r90 top value=0
R52 "CRCW06030000Z0EA" 0603 1307.4,765 r180 top value=0
R53 "CRCW06030000Z0EA" 0603 1390.75,510 r0 top value=0
R54 "CRCW06030000Z0EA" 0603 2175,1885 r0 bottom value=0
R55 "CRCW06030000Z0EA" 0603 1865,1845 r270 bottom value=0
R56 "CRCW06030000Z0EA" 0603 1664.56,2695 r0 bottom value=0
R57 "CRCW04023K30JNED" 0402 1470,4251.31 r270 top value=3.3k
R58 "CRCW04021K00FKED" 0402 1977.48,4470 r0 top value=1.00k
R59 "CRCW04021K00FKED" 0402 1977.48,4420 r0 top value=1.00k
R60 "CRCW04021K00FKED" 0402 1977.48,4370 r0 top value=1.00k
R61 "CRCW04021K00FKED" 0402 1977.48,4320 r0 top value=1.00k
R62 "CRCW0402100RJNED" 0402 1980,5345 r270 top value=100
R63 "ERJ-2RKF4700X" 0402 1080,5340 r270 top value=470
R64 "ERJ-2RKF4700X" 0402 1290,5340 r270 top value=470
R65 "CRCW040210K0JNED" 0402 1980,4750 r90 bottom value=10k
R66 "CRCW0402100RJNED" 0402 2030,4750 r270 bottom value=100
R67 "CRCW040210K0JNED" 0402 2080,4750 r270 bottom value=10k
R68 "CRCW04024K87FKED" 0402 1725,4510.11 r0 top value=4.87k
R69 "CRCW06030000Z0EA" 0603 1886.5,2466.8 r0 top value=0
R70 "CRCW040251R0JNED" 0402 1920,4640 r270 bottom value=51
R71 "CRCW06030000Z0EA" 0603 1885,2400.47 r180 top value=0
R72 "CRCW04021K00FKED" 0402 1479.25,250 r0 top value=1.00k
R73 "CRCW04021K00FKED" 0402 1369.25,250 r0 top value=1.00k
R74 "CRCW04021K00FKED" 0402 1259.25,250 r0 top value=1.00k
R75 "CRCW04021K00FKED" 0402 880,250 r0 top value=1.00k
R76 "CRCW04021K00FKED" 0402 770,250 r0 top value=1.00k
R77 "CRCW04021K00FKED" 0402 660,250 r0 top value=1.00k
R78 "CRCW040210K0JNED" 0402 1544.88,485 r90 top value=10k
R79 "RC0603FR-07120RL" 0603 1781.1,270 r0 top value=120
R80 "CRCW040210K0JNED" 0402 1805,485 r270 top value=10k
R81 "CRCW06030000Z0EA" 0603 1685,3305 r90 top value=0
R100 "CRCW04021M00FKED" 0402 660,5270 r90 top value=1.00Meg
R101 "CRCW040251K0FKED" 0402 120,4780 r0 top
R102 "CRCW040230K0FKED" 0402 120,4878 r180 top value=30.0k
R103 "RC0402JR-070RL" 0402 520,4840 r0 top value=0
R104 "RC0402JR-070RL" 0402 520,4780 r0 top value=0
R105 "CRCW0402680RJNED" 0402 280,4860 r270 top value=680
S1 "1188E-1K2-V-TR" SW_1188E 2180,4275 r180 top
S2 "CAS-D20TA" SW_CAS-D20TA 1283.81,3527.63 r0 top
S3 "CAS-D20TA" SW_CAS-D20TA 1385.12,1780 r180 top
S4 "CAS-220TA" SW_CAS-220TA 1671.73,865 r180 top
S5 "CAS-D20TA" SW_CAS-D20TA 1070.18,1550.5 r180 top
TP1 "TESTPOINT" TP_50MIL-25MILHOLE 1465,2785 r0 top
TP2 "TESTPOINT" TP_50MIL-25MILHOLE 950,2175 r0 top
TP3 "TESTPOINT" TP_50MIL-25MILHOLE 645,2500 r0 top
TP4 "TESTPOINT" TP_50MIL-25MILHOLE 1500,1500 r0 top
TP5 "TESTPOINT" TP_50MIL-25MILHOLE 1007.8,285 r0 top
TP6 "TESTPOINT" TP_50MIL-25MILHOLE 2050,1700 r0 top
TP7 "TESTPOINT" TP_50MIL-25MILHOLE 1785,715 r90 top
TP8 "TESTPOINT" TP_50MIL-25MILHOLE 1565,715 r90 top
U1 "TMS320F280025CPNSR" PN0080A-MFG 1149.98,2570.55 r315 top
U2 "MSP432E401YTPDT" PDT0128A 1600,4880 r0 top locked
U3 "ISOUSB111DW" DW0016B-MFG 840,4910 r0 top
U4 "TPS3702CX33DDCR" DDC0006A_N 2154.02,4725 r180 top
U5 "LMR62421XMFX/NOPB" DBV0005A_N 796.47,4180.77 r0 top
U6 "TS5A23157DGSR" DGS0010A_N 999.97,3937.39 r0 top
U7 "SN74LVC2G07DBVR" DBV0006A_N 1592.04,3736.53 r90 top
U8 "TS5A23157DGSR" DGS0010A_N 525,2055.5 r0 top
U9 "TS5A23157DGSR" DGS0010A_N 1300.9,3875 r90 top
U10 "SN74LVC2G34DBVR" DBV0006A_N 1497.6,3084.62 r90 top
U11 "SN74LV4053APWR" PW0016A-MFG 1150,1200 r180 top
U12 "TPD6E004RSER" RSE0008A 1425,4450 r180 top
U13 "SN74LVC8T245PW" PW0024A_N 1150,575 r270 top
U14 "SN74LV4053APWR" PW0016A-MFG 1550.38,1200 r180 top
U15 "SN65HVD234DR" D0008A_L 1675,550 r270 top
U100 "TPD4E004DRYR" DRY0006A 435,5195 r180 top
U101 "TPS79601DRBR" DRB0008B 170,5000 r270 top
USB101 "1051640001" Molex_1051640001 445,5460 r180 top
Y1 "NX3225GA-16.000M-STD-CRG-1" NDK_NX3225GA 2040,5010 r180 top
Y2 "ECS-200-8-30B-CKM" FP-ECS-200-8-30B-CKM_SMD4-MFG 1495,2090 r0 top
ZZ1 "These assemblies are ESD sensitive, ESD precautions shall be observed." AssemblyNote 250,7290 r0 top
ZZ2 "These assemblies must be clean and free from flux and all contaminants. Use of no clean flux is not acceptable." AssemblyNote 250,7165 r0 top
ZZ3 "These assemblies must comply with workmanship standards IPC-A-610 Class 2, unless otherwise specified." AssemblyNote 250,7040 r0 top

## Footprints (in the part's own frame and the unit in brackets; to place one, negate y for a bottom-side part, rotate by r counter-clockwise, add the part's x,y. Pads: shape width x height; smd on the part's side, far side on the other; paste and mask are expansions set on the pad)
0402 [mm] "0402 from SM-752 data"
  rect 0.8x0.6 smd: 1(-0.6,0) 2(0.6,0)
  silkscreen extent -1.22,-0.52 1.22,0.52, body extent -0.55,-0.3 0.55,0.3, height 0.6
0603 [mm] "0603 from SM-752 data"
  rect 1x0.95 smd: 1(-0.8,0) 2(0.8,0)
  silkscreen extent -1.52,-0.69 1.52,0.69, body extent -0.87,-0.47 0.87,0.47, height 1
0805_HV [mil] "0805 with 30mil clearance between pads"
  rect 50x63 smd: 1(-40,0) 2(40,0)
  silkscreen extent -74,-40 74,40, body extent -43,-29 43,29, height 57
1210_220 [mm] "1210"
  rect 1.3x2.7 smd: 1(-1.45,0) 2(1.45,0)
  silkscreen extent -2.32,-1.57 2.32,1.57, body extent -1.7,-1.35 1.7,1.35, height 2.2
1812 [mm]
  rect 1.6x3.4 smd: 1(-2,0) 2(2,0)
  silkscreen extent -0.8,-1.6 0.8,1.6, body extent -2.4,-1.7 2.4,1.7, height 1.35
AssemblyNote [mil] "Assembly Note"
BoosterPack_40pin_J1J3 [mm] "Receptacle, 2.54mm, 10x2, TH"
  rrect6% 1.55x1.55 hole 1.02: 1(1.27,11.43)
  round 1.55 hole 1.02: 2(1.27,8.89) 3(1.27,6.35) 4(1.27,3.81) 5(1.27,1.27) 6(1.27,-1.27) 7(1.27,-3.81) 8(1.27,-6.35) 9(1.27,-8.89) 10(1.27,-11.43) 21(-1.27,11.43) 22(-1.27,8.89) 23(-1.27,6.35) 24(-1.27,3.81) 25(-1.27,1.27) 26(-1.27,-1.27) 27(-1.27,-3.81) 28(-1.27,-6.35) 29(-1.27,-8.89) 30(-1.27,-11.43)
  silkscreen extent -7.62,-12.95 7.62,12.95, body extent -2.48,-12.95 2.48,12.95, height 8.51
BoosterPack_40pin_J2J4 [mm] "Receptacle, 2.54mm, 10x2, TH"
  round 1.55 hole 1.02: 11(-1.27,-11.43) 12(-1.27,-8.89) 13(-1.27,-6.35) 14(-1.27,-3.81) 15(-1.27,-1.27) 16(-1.27,1.27) 17(-1.27,3.81) 18(-1.27,6.35) 19(-1.27,8.89) 20(-1.27,11.43) 31(1.27,-11.43) 32(1.27,-8.89) 33(1.27,-6.35) 34(1.27,-3.81) 35(1.27,-1.27) 36(1.27,1.27) 37(1.27,3.81) 38(1.27,6.35) 39(1.27,8.89) 40(1.27,11.43)
  silkscreen extent -7.62,-12.95 2.48,12.95, body extent -2.48,-12.95 2.48,12.95, height 8.51
BoosterPack_40pin_J5J7 [mm] "Receptacle, 2.54mm, 10x2, TH"
  round 1.55 hole 1.02: 41(1.27,11.43) 42(1.27,8.89) 43(1.27,6.35) 44(1.27,3.81) 45(1.27,1.27) 46(1.27,-1.27) 47(1.27,-3.81) 48(1.27,-6.35) 49(1.27,-8.89) 50(1.27,-11.43) 61(-1.27,11.43) 62(-1.27,8.89) 63(-1.27,6.35) 64(-1.27,3.81) 65(-1.27,1.27) 66(-1.27,-1.27) 67(-1.27,-3.81) 68(-1.27,-6.35) 69(-1.27,-8.89) 70(-1.27,-11.43)
  silkscreen extent -7.62,-12.95 7.62,12.95, body extent -2.48,-12.95 2.48,12.95, height 8.51
BoosterPack_40pin_J6J8 [mm] "Receptacle, 2.54mm, 10x2, TH"
  round 1.55 hole 1.02: 51(-1.27,-11.43) 52(-1.27,-8.89) 53(-1.27,-6.35) 54(-1.27,-3.81) 55(-1.27,-1.27) 56(-1.27,1.27) 57(-1.27,3.81) 58(-1.27,6.35) 59(-1.27,8.89) 60(-1.27,11.43) 71(1.27,-11.43) 72(1.27,-8.89) 73(1.27,-6.35) 74(1.27,-3.81) 75(1.27,-1.27) 76(1.27,1.27) 77(1.27,3.81) 78(1.27,6.35) 79(1.27,8.89) 80(1.27,11.43)
  silkscreen extent -7.62,-12.95 2.48,12.95, body extent -2.48,-12.95 2.48,12.95, height 8.51
CE_Mark_5mm [mil] "Minimum text height for CE Mark"
  silkscreen extent -138,-98 138,98
D0008A_L [mm] "SOIC, 8-Leads, Body 4.9x3.9mm, Pitch 1.27mm, IPC High Density"
  oval 1.25x0.55 smd: 1(-2.625,1.905) 2(-2.625,0.635) 3(-2.625,-0.635) 4(-2.625,-1.905) 5(2.625,-1.905) 6(2.625,-0.635) 7(2.625,0.635) 8(2.625,1.905)
  silkscreen extent -3.1,-2.5 0.9,2.5, body extent -3,-2.45 3,2.45, height 1.63
DBV0005A_N [mm] "SOT23, 5-Leads, Body 2.9x1.6mm, Pitch 0.95mm, Lead Span 2.8mm, IPC Medium Density"
  rrect17% 1x0.6 smd: 1(-1.375,0.95) 2(-1.375,0) 3(-1.375,-0.95) 4(1.375,-0.95) 5(1.375,0.95)
  silkscreen extent -0.25,-1.55 0.25,1.55, body extent -1.42,-1.46 1.42,1.46, height 1.09
DBV0006A_N [mm] "SOT23, 6-Leads, Body 2.9x1.6mm, Pitch 0.95mm, Lead Span 2.8mm, IPC Medium Density"
  rrect17% 1x0.6 smd: 1(-1.375,0.95) 2(-1.375,0) 3(-1.375,-0.95) 4(1.375,-0.95) 5(1.375,0) 6(1.375,0.95)
  silkscreen extent -1.67,-1.55 0.5,1.55, body extent -1.42,-1.46 1.42,1.46, height 1.12
DDC0006A_N [mm]
  rrect17% 1x0.6 smd: 1(-1.375,0.95) 2(-1.375,0) 3(-1.375,-0.95) 4(1.375,-0.95) 5(1.375,0) 6(1.375,0.95)
  silkscreen extent -1.75,-1.52 0.7,1.53, body extent -1.43,-1.48 1.43,1.49, height 0.92
DGS0010A_N [mm] "TSSOP, 10-Leads, Body 3x3mm, Pitch 0.5mm, IPC Medium Density"
  oval 1.35x0.3 smd: 1(-2.225,1) 2(-2.225,0.5) 3(-2.225,0) 4(-2.225,-0.5) 5(-2.225,-1) 6(2.225,-1) 7(2.225,-0.5) 8(2.225,0) 9(2.225,0.5) 10(2.225,1)
  silkscreen extent -2.75,-1.55 0.9,1.55, body extent -2.45,-1.5 2.45,1.5, height 0.96
DRB0008B [mm] "SON, 8-Leads, Body 3x3mm, Pitch 0.65mm, Thermal Pad 2.4x1.65mm, TI Recommended"
  rrect33% 0.6x0.3 smd: 1(-1.4,0.975) 2(-1.4,0.325) 3(-1.4,-0.325) 4(-1.4,-0.975) 5(1.4,-0.975) 6(1.4,-0.325) 7(1.4,0.325) 8(1.4,0.975)
  rrect9% 1.47x1.06 on Top Paste: 9(0,0.63) 9(0,-0.63)
  rrect6% 1.65x2.4 smd paste-1.2: 9(0,0)
  silkscreen extent -1.73,-1.73 1.73,1.73, body extent -1.5,-1.5 1.5,1.5, height 0.96
DRY0006A [mm] "USON-6"
  rrect67% 0.45x0.3 smd paste-0.05 mask-0.05: 1(-0.275,0.5)
  rrect67% 0.4x0.3 smd paste-0.05 mask-0.05: 2(-0.3,0) 3(-0.3,-0.5) 4(0.3,-0.5) 5(0.3,0) 6(0.3,0.5)
  body extent -0.5,-0.72 0.5,0.73, height 0.58
DW0016B-MFG [mm] "SOIC, 16-Leads, Body 10.3x7.5mm, Pitch 1.27mm"
  rrect17% 1.65x0.6 smd paste+0 mask+0: 1(-4.875,4.445) 2(-4.875,3.175) 3(-4.875,1.905) 4(-4.875,0.635) 5(-4.875,-0.635) 6(-4.875,-1.905) 7(-4.875,-3.175) 8(-4.875,-4.445) 9(4.875,-4.445) 10(4.875,-3.175) 11(4.875,-1.905) 12(4.875,-0.635) 13(4.875,0.635) 14(4.875,1.905) 15(4.875,3.175) 16(4.875,4.445)
  silkscreen extent -6.37,-5.25 3.5,5.25, body extent -5.8,-5.5 5.8,5.5, height 0.25
FCC_disclaimer [mil]
Fiducial10-20 [mm]
  round 1 smd mask+0.5: 1(0,0)
  Top Signal keep-out circle w1.178: c0,0 r0.5
FP-ECS-200-8-30B-CKM_SMD4-MFG [mm]
  rrect8% 1.6x1.25 smd paste+0 mask+0: 1(-1.85,-1.1) 2(1.85,-1.1) 3(1.85,1.1) 4(-1.85,1.1)
  silkscreen extent -3.27,-1.7 2.6,1.7, body extent -2.75,-1.83 2.75,1.83, height 0.25
LED_LTST-C171 [mm] "LITE-ON"
  rect 1.2x1.2 smd: 1(-1.05,0) 2(1.05,0)
  silkscreen extent -1.6,-1 2.2,1, body extent -1.05,-0.67 1.05,0.67, height 0.8
LTST-C170TBKT_Blue [mm] "LITE-ON"
  rect 1.2x1.2 smd: 1(-1.05,0) 2(1.05,0)
  silkscreen extent -1.6,-1 2.2,1, body extent -1.05,-0.67 1.05,0.67, height 1.2
Molex_1051640001 [mm] "Receptacle, USB 2.0, Micro B, 5 Pos, 0.65mm Pitch, R/A, SMT"
  rrect22% 0.45x1.38 smd: 1(1.3,4.11) 2(0.65,4.11) 3(0,4.11) 4(-0.65,4.11) 5(-1.3,4.11)
  rrect7% 1.475x2.1 smd: 6(-2.462,3.75) 11(2.462,3.75)
  rrect100% 1.4x2.1 hole 0.6 slot 1.3 at 90 deg: 7(-3.95,1.45) 10(3.95,1.45)
  rrect7% 1.375x1.9 smd: 8(-0.937,1.45) 9(0.937,1.45)
  silkscreen extent 1.2,5.1 1.4,5.4, body extent -4.1,-0.7 4.1,4.47, height 2.45
NDK_NX3225GA [mm] "NDK"
  rect 1.2x1.4 smd: 1(-0.8,1.1) 2(-0.8,-1.1) 3(0.8,-1.1) 4(0.8,1.1)
  silkscreen extent -1.9,-0.1 1.4,2, body extent -1.3,-1.65 1.3,1.65, height 0.9
NPTH125mil [mil]
  round 120 hole 125 unplated mask+15: 1(0,0)
PDT0128A [mm] "Thin QFP, 128-Leads, Body 14x14mm, Pitch 0.4mm"
  oval 1.4x0.2 smd: 1(-7.7,6.2) 2(-7.7,5.8) 3(-7.7,5.4) 4(-7.7,5) 5(-7.7,4.6) 6(-7.7,4.2) 7(-7.7,3.8) 8(-7.7,3.4) 9(-7.7,3) 10(-7.7,2.6) 11(-7.7,2.2) 12(-7.7,1.8) 13(-7.7,1.4) 14(-7.7,1) 15(-7.7,0.6) 16(-7.7,0.2) 17(-7.7,-0.2) 18(-7.7,-0.6) 19(-7.7,-1) 20(-7.7,-1.4) 21(-7.7,-1.8) 22(-7.7,-2.2) 23(-7.7,-2.6) 24(-7.7,-3) 25(-7.7,-3.4) 26(-7.7,-3.8) 27(-7.7,-4.2) 28(-7.7,-4.6) 29(-7.7,-5) 30(-7.7,-5.4) 31(-7.7,-5.8) 32(-7.7,-6.2) 65(7.7,-6.2) 66(7.7,-5.8) 67(7.7,-5.4) 68(7.7,-5) 69(7.7,-4.6) 70(7.7,-4.2) 71(7.7,-3.8) 72(7.7,-3.4) 73(7.7,-3) 74(7.7,-2.6) 75(7.7,-2.2) 76(7.7,-1.8) 77(7.7,-1.4) 78(7.7,-1) 79(7.7,-0.6) 80(7.7,-0.2) 81(7.7,0.2) 82(7.7,0.6) 83(7.7,1) 84(7.7,1.4) 85(7.7,1.8) 86(7.7,2.2) 87(7.7,2.6) 88(7.7,3) 89(7.7,3.4) 90(7.7,3.8) 91(7.7,4.2) 92(7.7,4.6) 93(7.7,5) 94(7.7,5.4) 95(7.7,5.8) 96(7.7,6.2)
  oval 0.2x1.4 smd: 33(-6.2,-7.7) 34(-5.8,-7.7) 35(-5.4,-7.7) 36(-5,-7.7) 37(-4.6,-7.7) 38(-4.2,-7.7) 39(-3.8,-7.7) 40(-3.4,-7.7) 41(-3,-7.7) 42(-2.6,-7.7) 43(-2.2,-7.7) 44(-1.8,-7.7) 45(-1.4,-7.7) 46(-1,-7.7) 47(-0.6,-7.7) 48(-0.2,-7.7) 49(0.2,-7.7) 50(0.6,-7.7) 51(1,-7.7) 52(1.4,-7.7) 53(1.8,-7.7) 54(2.2,-7.7) 55(2.6,-7.7) 56(3,-7.7) 57(3.4,-7.7) 58(3.8,-7.7) 59(4.2,-7.7) 60(4.6,-7.7) 61(5,-7.7) 62(5.4,-7.7) 63(5.8,-7.7) 64(6.2,-7.7) 97(6.2,7.7) 98(5.8,7.7) 99(5.4,7.7) 100(5,7.7) 101(4.6,7.7) 102(4.2,7.7) 103(3.8,7.7) 104(3.4,7.7) 105(3,7.7) 106(2.6,7.7) 107(2.2,7.7) 108(1.8,7.7) 109(1.4,7.7) 110(1,7.7) 111(0.6,7.7) 112(0.2,7.7) 113(-0.2,7.7) 114(-0.6,7.7) 115(-1,7.7) 116(-1.4,7.7) 117(-1.8,7.7) 118(-2.2,7.7) 119(-2.6,7.7) 120(-3,7.7) 121(-3.4,7.7) 122(-3.8,7.7) 123(-4.2,7.7) 124(-4.6,7.7) 125(-5,7.7) 126(-5.4,7.7) 127(-5.8,7.7) 128(-6.2,7.7)
  silkscreen extent -7.7,-6.3 6.3,6.99, body extent -8,-8 8,8, height 1.07
PN0080A-MFG [mm]
  oval 1.45x0.3 smd: 1(-6.725,4.75) 2(-6.725,4.25) 3(-6.725,3.75) 4(-6.725,3.25) 5(-6.725,2.75) 6(-6.725,2.25) 7(-6.725,1.75) 8(-6.725,1.25) 9(-6.725,0.75) 10(-6.725,0.25) 11(-6.725,-0.25) 12(-6.725,-0.75) 13(-6.725,-1.25) 14(-6.725,-1.75) 15(-6.725,-2.25) 16(-6.725,-2.75) 17(-6.725,-3.25) 18(-6.725,-3.75) 19(-6.725,-4.25) 20(-6.725,-4.75) 41(6.725,-4.75) 42(6.725,-4.25) 43(6.725,-3.75) 44(6.725,-3.25) 45(6.725,-2.75) 46(6.725,-2.25) 47(6.725,-1.75) 48(6.725,-1.25) 49(6.725,-0.75) 50(6.725,-0.25) 51(6.725,0.25) 52(6.725,0.75) 53(6.725,1.25) 54(6.725,1.75) 55(6.725,2.25) 56(6.725,2.75) 57(6.725,3.25) 58(6.725,3.75) 59(6.725,4.25) 60(6.725,4.75)
  oval 0.3x1.45 smd: 21(-4.75,-6.725) 22(-4.25,-6.725) 23(-3.75,-6.725) 24(-3.25,-6.725) 25(-2.75,-6.725) 26(-2.25,-6.725) 27(-1.75,-6.725) 28(-1.25,-6.725) 29(-0.75,-6.725) 30(-0.25,-6.725) 31(0.25,-6.725) 32(0.75,-6.725) 33(1.25,-6.725) 34(1.75,-6.725) 35(2.25,-6.725) 36(2.75,-6.725) 37(3.25,-6.725) 38(3.75,-6.725) 39(4.25,-6.725) 40(4.75,-6.725) 61(4.75,6.725) 62(4.25,6.725) 63(3.75,6.725) 64(3.25,6.725) 65(2.75,6.725) 66(2.25,6.725) 67(1.75,6.725) 68(1.25,6.725) 69(0.75,6.725) 70(0.25,6.725) 71(-0.25,6.725) 72(-0.75,6.725) 73(-1.25,6.725) 74(-1.75,6.725) 75(-2.25,6.725) 76(-2.75,6.725) 77(-3.25,6.725) 78(-3.75,6.725) 79(-4.25,6.725) 80(-4.75,6.725)
  silkscreen extent -6.85,-5.6 5.6,5.6, body extent -7.5,-7.5 7.5,7.5, height 0.25
PW0016A-MFG [mm]
  rrect22% 1.5x0.45 smd paste+0 mask+0: 1(-2.9,2.275) 2(-2.9,1.625) 3(-2.9,0.975) 4(-2.9,0.325) 5(-2.9,-0.325) 6(-2.9,-0.975) 7(-2.9,-1.625) 8(-2.9,-2.275) 9(2.9,-2.275) 10(2.9,-1.625) 11(2.9,-0.975) 12(2.9,-0.325) 13(2.9,0.325) 14(2.9,0.975) 15(2.9,1.625) 16(2.9,2.275)
  silkscreen extent -4.38,-2.55 1.78,2.55, body extent -3.75,-2.8 3.75,2.8, height 0.25
PW0024A_N [mm] "TSOP, 24-Leads, Body 7.8x4.4mm, Pitch 0.65mm, IPC Medium Density"
  oval 1.4x0.45 smd: 1(-2.95,3.575) 2(-2.95,2.925) 3(-2.95,2.275) 4(-2.95,1.625) 5(-2.95,0.975) 6(-2.95,0.325) 7(-2.95,-0.325) 8(-2.95,-0.975) 9(-2.95,-1.625) 10(-2.95,-2.275) 11(-2.95,-2.925) 12(-2.95,-3.575) 13(2.95,-3.575) 14(2.95,-2.925) 15(2.95,-2.275) 16(2.95,-1.625) 17(2.95,-0.975) 18(2.95,-0.325) 19(2.95,0.325) 20(2.95,0.975) 21(2.95,1.625) 22(2.95,2.275) 23(2.95,2.925) 24(2.95,3.575)
  silkscreen extent -3.51,-3.95 1.6,4.04, body extent -3.21,-3.9 3.21,3.9, height 1
RSE0008A [mm] "QFN, 8-Leads, Body 1.5x1.5mm, Pitch 0.5mm, TI Recommended"
  rrect40% 0.55x0.25 smd: 1(-0.675,0.5) 3(-0.675,-0.5) 5(0.675,-0.5) 7(0.675,0.5)
  rrect50% 0.55x0.2 smd: 2(-0.675,0) 6(0.675,0)
  rrect33% 0.3x0.6 smd: 4(0,-0.65) 8(0,0.65)
  silkscreen extent -1.02,-0.93 0.78,0.93, body extent -0.75,-0.75 0.75,0.75, height 0.6
Samtec_FTSH-105-01-x-DV-K [mm] "Header(Shrouded), 1.27mm, 5x2, SMT"
  rect 2.79x0.74 smd: 1(-2.035,2.54) 2(2.035,2.54) 3(-2.035,1.27) 4(2.035,1.27) 5(-2.035,0) 6(2.035,0) 7(-2.035,-1.27) 8(2.035,-1.27) 9(-2.035,-2.54) 10(2.035,-2.54)
  silkscreen extent -3.73,-3.48 3.73,3.48, body extent -2.92,-3.18 2.92,3.17, height 6.13
SOD-123 [mm] "On Semi recommended land pattern"
  rect 0.915x1.22 smd: 1(-1.637,0) 2(1.637,0)
  silkscreen extent -2.74,-1.17 2.03,1.17, body extent -1.93,-0.9 1.93,0.9, height 1.35
SW_1188E [mm] "SMD, 4-Leads, Body 7.8x3.5mm"
  rrect10% 1x1.45 smd: 1(-1.1,3.375) 2(-1.1,-3.375)
  rrect11% 1.3x0.9 smd: 3(0.7,2.1) 4(0.7,-2.1)
  round 0 hole 0.9 unplated mask+0.051: ""(-0.35,1.15) ""(-0.35,-1.15)
  silkscreen extent -1.98,-2.28 0.95,2.28, body extent -2.55,-3.9 1.05,3.9, height 3.5
SW_CAS-220TA [mm] "COPAL ELECTRONICS"
  rect 1.6x1 smd: 1(-1.85,1.75) 2(-1.85,0) 3(-1.85,-1.75) 4(1.85,1.75) 5(1.85,0) 6(1.85,-1.75)
  silkscreen extent -2.1,-2.9 2,3.7, body extent -2.1,-2.85 2.1,2.85, height 2.51
SW_CAS-D20TA [mm] "SMD, 6-Leads, Body 5.4x3.9mm, Pitch 1.75mm"
  rect 1.6x1 smd: 1(-1.85,1.75) 2(-1.85,0) 3(-1.85,-1.75) 4(1.85,1.75) 5(1.85,0) 6(1.85,-1.75)
  silkscreen extent -1.95,-2.7 1.95,2.9, body extent -2.1,-2.7 2.1,2.7, height 2.5
Tag_TC2050-NL [mil] "Footprint for Tag-Connect TC2050 No-Legs cables"
  round 31 smd paste-15.75: 1(-25,100) 2(-25,50) 3(-25,0) 4(-25,-50) 5(-25,-100) 6(25,-100) 7(25,-50) 8(25,0) 9(25,50) 10(25,100)
  round 39 hole 39 unplated: MH1(0,150) MH2(-40,-150) MH3(40,-150)
  silkscreen extent -105,-200 75,200
TI_Stacked_Overlay_Small [mil]
  silkscreen extent -418,-98 418,98
TI_Symbol_Overlay_Small [mil]
  silkscreen extent -90,-88 91,88
TP_50MIL-25MILHOLE [mil]
  round 50 hole 25: 1(0,0)
TSW-102-07-G-D [mm] "Samtec 100mil, 2x2, 230 mil above insulator"
  rrect6% 1.65x1.65 hole 1.016: 1(-1.27,-1.27)
  round 1.65 hole 1.016: 2(-1.27,1.27) 3(1.27,-1.27) 4(1.27,1.27)
  silkscreen extent -3.56,-2.54 2.54,2.54, body extent -2.54,-2.54 2.54,2.54, height 8.38
TSW-104-07-G-D [mm] "Samtec 100mil, 2x4, 230 mil above insulator"
  rrect6% 1.65x1.65 hole 1.016: 1(-3.81,-1.27)
  round 1.65 hole 1.016: 2(-3.81,1.27) 3(-1.27,-1.27) 4(-1.27,1.27) 5(1.27,-1.27) 6(1.27,1.27) 7(3.81,-1.27) 8(3.81,1.27)
  silkscreen extent -6.11,-2.54 5.08,2.54, body extent -5.08,-2.54 5.08,2.54, height 8.38
TSW-105-07-G-D [mm] "Samtec 100mil, 2x5, 230 mil above insulator"
  rrect6% 1.65x1.65 hole 1.016: 1(-5.08,-1.27)
  round 1.65 hole 1.016: 2(-5.08,1.27) 3(-2.54,-1.27) 4(-2.54,1.27) 5(0,-1.27) 6(0,1.27) 7(2.54,-1.27) 8(2.54,1.27) 9(5.08,-1.27) 10(5.08,1.27)
  silkscreen extent -7.37,-2.54 6.35,2.54, body extent -6.35,-2.54 6.35,2.54, height 8.38
TSW-105-07-X-S [mm] "Samtec 100mil, 1x5, 230 mil above insulator"
  rrect6% 1.65x1.65 hole 1.016: 1(-5.08,-0.025)
  round 1.65 hole 1.016: 2(-2.54,0) 3(0,0) 4(2.54,0) 5(5.08,0)
  silkscreen extent -7.05,-1.25 6.37,1.25, body extent -6.35,-1.27 6.35,1.27, height 8.38
WE-TPC_2828 [mm] "WURTH"
  rect 1x3.2 smd: 1(-1.1,0) 2(1.1,0)
  body extent -1.5,-1.5 1.5,1.5, height 3
WEEE_Minimum [mil] "WEEElie bin"
  silkscreen extent -95,-172 99,104
WL-SMCW_RED_0805 [mm] "SMD, 2-Leads, Body 1.6x0.8mm"
  rect 1.1x1.2 smd: 1(-1.05,0) 2(1.05,0)
  silkscreen extent -2.4,-1.1 1.5,1.1, body extent -1,-0.62 1,0.63, height 0.7
Wurth_60900213421 [mil] "Shunt, 2.54mm, Black"
  round 1 on Mech3: 0(0,0)
  body extent -98,-48 98,48, height 338
WURTH_61300211121 [mm] "Header, 2.54mm, 2x1, TH"
  rect 1.65x1.65 hole 1.15: 1(-1.27,0)
  round 1.65 hole 1.15: 2(1.27,0)
  silkscreen extent -2.54,-1.27 2.54,1.6, body extent -2.54,-1.27 2.54,1.27, height 8.54
WURTH_61300311121 [mm] "Header, 2.54mm, 3x1, TH"
  rect 1.65x1.65 hole 1.15: 1(-2.54,0)
  round 1.65 hole 1.15: 2(0,0) 3(2.54,0)
  silkscreen extent -3.81,-1.65 3.81,1.27, body extent -3.81,-1.27 3.81,1.27, height 8.54